# Altium PCB Micro.PcbDoc
Units mm, origin at the board's own origin, x right, y up, seen from the top; angles counter-clockwise.
Board outline 152.4 x 101.6 mm, 2 copper layers (Top Layer, Bottom Layer); 42 components, 61 nets, 210 pads, 12 vias.
Unrouted connection lines stored in the file: 96.
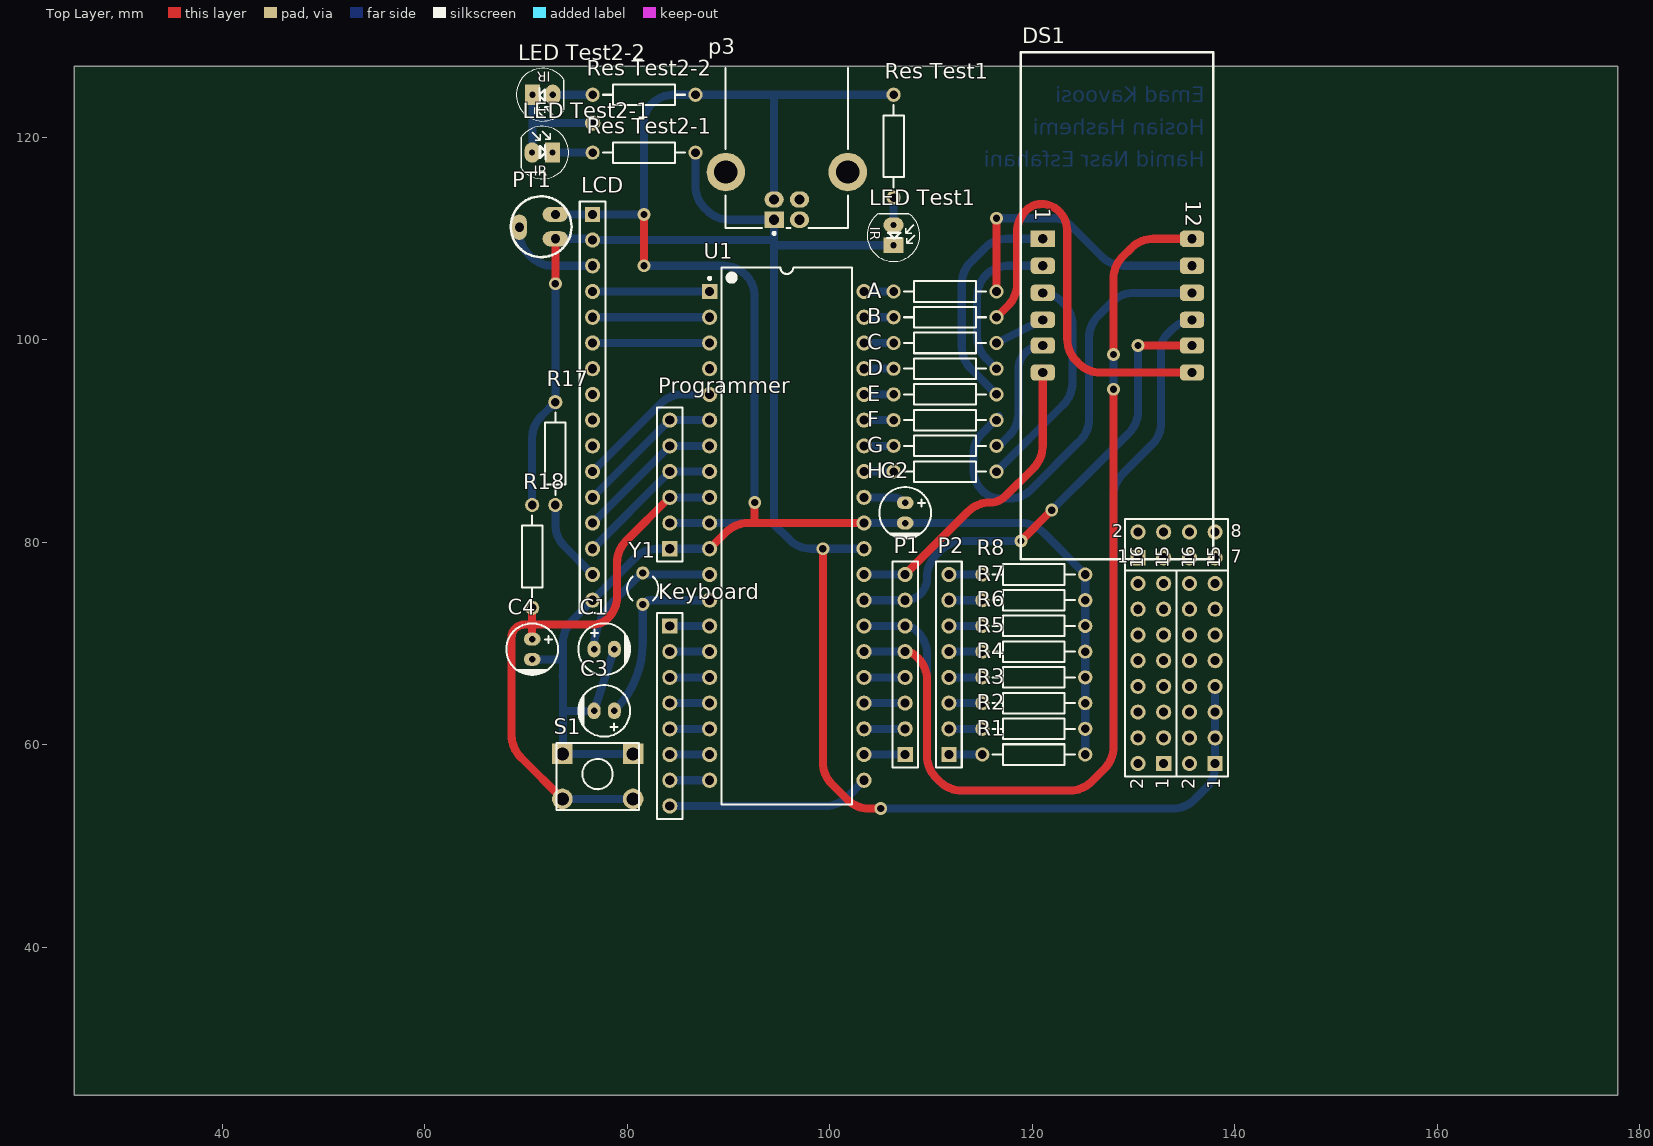
[diagram p0: Top Layer view]
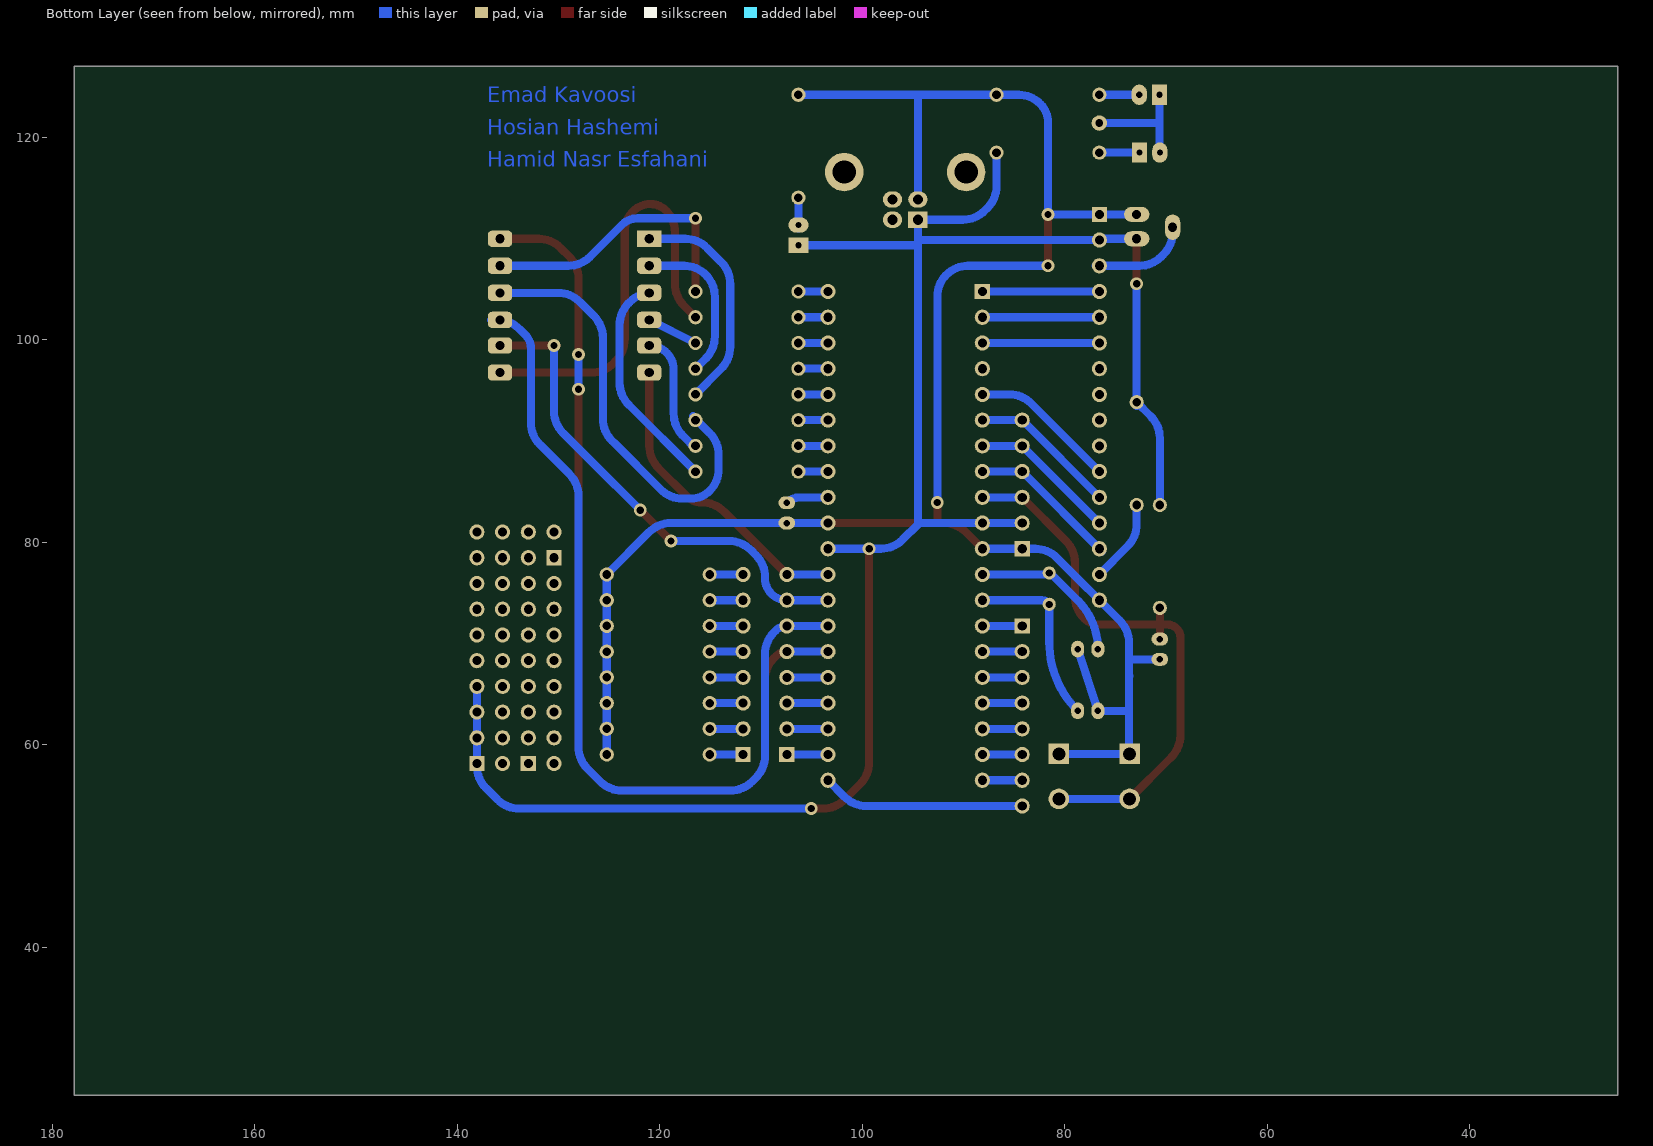
[diagram p1: Bottom Layer view, seen from below]

## Layer stack, top to bottom
Top Solder: solder mask 0.0102, Solder Resist, Dk 3.5
Top Layer: signal copper 0.0356
Dielectric 1: dielectric 0.32, FR-4, Dk 4.8
Bottom Layer: signal copper 0.0356
Bottom Solder: solder mask 0.0102, Solder Resist, Dk 3.5

## Board outline
25.4,25.4 177.8,25.4 177.8,127 25.4,127

## Design rules (kind name [scope] priority, off if disabled: settings)
Clearance [All] p1: gap=0.8 ignorepadtopadclearanceinfootprint=FALSE
PolygonConnect [All] p1: connectstyle=Relief reliefconductorwidth=0.254 reliefentries=4 polygonreliefangle="90 Angle" airgapwidth=0.254
RoomDefinition Micro [InComponentClass('Micro')] p1: confinementstyle=ConfineIn formatcopy=TRUE lockcomponents=FALSE outline 178.943,26.924 367.284,26.924 367.284,83.058 178.943,83.058
RoutingVias [All] p1: holewidth=0.711 width=1.27 viastyle="Through Hole" minholewidth=0.711 minwidth=1.27 maxholewidth=0.711 maxwidth=1.27
SolderMaskExpansion [All] p1: expansion=0.102
Width [All] p1: maxlimit=1 minlimit=0.8 preferedwidth=0.8
30 further rules are at their usual default settings.

## Components (designator, comment, footprint, x,y, rotation, side; value= is the part's Value field where it differs from the comment)
A "" AXIAL-0.4 111.379,104.775 r0 top
B "" AXIAL-0.4 111.379,102.235 r0 top
C "" AXIAL-0.4 111.379,99.695 r0 top
C1 "1uF" "cap 01" 77.724,69.469 r180 top
C2 "1uF" "cap 01" 107.442,82.915 r90 top
C3 "1uF" "cap 01" 77.724,63.373 r0 top
C4 "1uF" "cap 01" 70.612,69.453 r90 top
D "" AXIAL-0.4 111.379,97.155 r0 top
DS1 "7Segment-4Digit-CA" 7segCA 118.872,128.397 r270 top
E "" AXIAL-0.4 111.379,94.615 r0 top
F "" AXIAL-0.4 111.379,92.075 r0 top
G "" AXIAL-0.4 111.379,89.535 r0 top
H "" AXIAL-0.4 111.379,86.995 r0 top
Keyboard "" HDR1X8 84.201,71.755 r270 top
LCD "" HDR1X16 76.581,112.395 r270 top
"LED Test1" "IR Reciever" "LED-5mm-IR Reciver" 106.299,111.347 r270 top
"LED Test2-1" "IR Reciever" "LED-5mm-IR Reciver" 70.612,118.491 r0 top
"LED Test2-2" "IR Reciever" "LED-5mm-IR Reciver" 72.644,124.206 r180 top
P1 "" HDR1X8 107.442,59.055 r90 top
P2 "Header 8" HDR1X8 111.76,59.055 r90 top
p3 "USB Connector" USB2.5-2H4F 95.758,126.873 r90 top
Programmer "" HDR1X6 84.201,79.375 r90 top
PT1 "POT4" POT4 71.501,111.252 r90 top
R1 "Res2" AXIAL-0.4 120.142,59.055 r0 top value=1K
R2 "Res2" AXIAL-0.4 120.142,61.595 r0 top value=1K
R3 "Res2" AXIAL-0.4 120.142,64.135 r0 top value=1K
R4 "Res2" AXIAL-0.4 120.142,66.675 r0 top value=1K
R5 "Res2" AXIAL-0.4 120.142,69.215 r0 top value=1K
R6 "Res2" AXIAL-0.4 120.142,71.755 r0 top value=1K
R7 "Res2" AXIAL-0.4 120.142,74.295 r0 top value=1K
R8 "Res2" AXIAL-0.4 120.142,76.835 r0 top value=1K
R17 "Res2" AXIAL-0.4 72.898,88.773 r90 top value=1K
R18 "Res2" AXIAL-0.4 70.612,78.613 r90 top value=1K
"Res Test1" "" AXIAL-0.4 106.299,119.126 r270 top value=1K
"Res Test2-1" "Res2" AXIAL-0.4 81.661,118.491 r0 top value=1K
"Res Test2-2" "Res2" AXIAL-0.4 81.661,124.206 r180 top value=1K
S1 "Switch PB" "Switch - Push to On" 77.089,56.896 r0 top
U1 "ATmega32-16PU" 40P6 95.758,80.645 r0 top
Y1 "XTAL" R38 81.534,75.438 r180 top
? "" HDR2X4 130.429,78.486 r0 top
? "" HDR2X8 138.049,58.166 r90 top
? "" HDR2X8 132.969,58.166 r90 top

## Footprints (in the part's own frame and the unit in brackets; to place one, negate y for a bottom-side part, rotate by r counter-clockwise, add the part's x,y. Pads: shape width x height; smd on the part's side, far side on the other; paste and mask are expansions set on the pad)
7segCA [mm] "7seg-CA; 12 Leads"
  rect 1.6x2.4 hole 0.9: 1(18.415,2.159)
  rrect50% 1.6x2.4 hole 0.9: 2(21.082,2.159) 3(23.749,2.159) 4(26.416,2.159) 5(28.956,2.159) 6(31.623,2.159) 7(31.623,16.891) 8(28.956,16.891) 9(26.416,16.891) 10(23.749,16.891) 11(21.082,16.891) 12(18.415,16.891)
  silkscreen extent 0,0 50.04,19
40P6 [mm] "40-Pin Ceramic Dual In-Line Package (CerDIP)"
  rect 1.5x1.5 hole 0.9: 1(-7.62,24.13)
  round 1.5 hole 0.9: 2(-7.62,21.59) 3(-7.62,19.05) 4(-7.62,16.51) 5(-7.62,13.97) 6(-7.62,11.43) 7(-7.62,8.89) 8(-7.62,6.35) 9(-7.62,3.81) 10(-7.62,1.27) 11(-7.62,-1.27) 12(-7.62,-3.81) 13(-7.62,-6.35) 14(-7.62,-8.89) 15(-7.62,-11.43) 16(-7.62,-13.97) 17(-7.62,-16.51) 18(-7.62,-19.05) 19(-7.62,-21.59) 20(-7.62,-24.13) 21(7.62,-24.13) 22(7.62,-21.59) 23(7.62,-19.05) 24(7.62,-16.51) 25(7.62,-13.97) 26(7.62,-11.43) 27(7.62,-8.89) 28(7.62,-6.35) 29(7.62,-3.81) 30(7.62,-1.27) 31(7.62,1.27) 32(7.62,3.81) 33(7.62,6.35) 34(7.62,8.89) 35(7.62,11.43) 36(7.62,13.97) 37(7.62,16.51) 38(7.62,19.05) 39(7.62,21.59) 40(7.62,24.13)
  silkscreen extent -7.74,-26.5 6.45,26.5, body extent -7.05,-26.47 7.05,26.47, height 4.83
AXIAL-0.4 [mm] "Axial Device, Thru-Hole; 2 Leads; 0.4 in Pin Spacing"
  round 1.4 hole 0.85: 1(-5.08,0) 2(5.08,0)
  silkscreen extent -4.06,-1.02 4.06,1.02
"cap 01" [mm]
  oval 1.27x1.651 hole 0.635: 1(1,0) 2(-1,0)
  silkscreen extent -2.55,-2.55 2.55,2.55, body extent -2.53,-2.53 2.53,2.53, height 12.54
HDR1X6 [mm] "Connector; Header; 6 Position"
  rect 1.5x1.5 hole 0.9: 1(0,0)
  round 1.5 hole 0.9: 2(2.54,0) 3(5.08,0) 4(7.62,0) 5(10.16,0) 6(12.7,0)
  silkscreen extent -1.27,-1.27 13.97,1.27
HDR1X8 [mm] "Connector; Header; 8 Position"
  rect 1.5x1.5 hole 0.9: 1(0,0)
  round 1.5 hole 0.9: 2(2.54,0) 3(5.08,0) 4(7.62,0) 5(10.16,0) 6(12.7,0) 7(15.24,0) 8(17.78,0)
  silkscreen extent -1.27,-1.27 19.05,1.27
HDR1X16 [mm] "Connector; Header; 16 Position"
  rect 1.5x1.5 hole 0.9: 1(0,0)
  round 1.5 hole 0.9: 2(2.54,0) 3(5.08,0) 4(7.62,0) 5(10.16,0) 6(12.7,0) 7(15.24,0) 8(17.78,0) 9(20.32,0) 10(22.86,0) 11(25.4,0) 12(27.94,0) 13(30.48,0) 14(33.02,0) 15(35.56,0) 16(38.1,0)
  silkscreen extent -1.27,-1.27 39.37,1.27
HDR2X4 [mm] "Connector; Header; 4x2 Position"
  rect 1.5x1.5 hole 0.9: 1(0,0)
  round 1.5 hole 0.9: 2(0,2.54) 3(2.54,0) 4(2.54,2.54) 5(5.08,0) 6(5.08,2.54) 7(7.62,0) 8(7.62,2.54)
  silkscreen extent -1.27,-1.27 8.89,3.81
HDR2X8 [mm] "Connector; Header; 8x2 Position"
  rect 1.5x1.5 hole 0.9: 1(0,0)
  round 1.5 hole 0.9: 2(0,2.54) 3(2.54,0) 4(2.54,2.54) 5(5.08,0) 6(5.08,2.54) 7(7.62,0) 8(7.62,2.54) 9(10.16,0) 10(10.16,2.54) 11(12.7,0) 12(12.7,2.54) 13(15.24,0) 14(15.24,2.54) 15(17.78,0) 16(17.78,2.54)
  silkscreen extent -1.27,-1.27 19.05,3.81
"LED-5mm-IR Reciver" [mm]
  oval 1.5x2 hole 0.6: 1(0,0)
  rect 1.5x2 hole 0.6: 2(2,0)
  silkscreen extent -1.1,-2.6 3.6,2.6
POT4 [mm]
  oval 1.5x2.5 hole 0.9: 1(-1.27,-1.397) 2(1.143,-1.397)
  oval 2.5x1.5 hole 0.9: 3(-0.127,2.159)
  silkscreen extent -3.08,-3 2.92,3
R38 [mm] "Crystal, Thru-Hole; 2 Leads; Body 3.1 x 8.2 mm (Dia.xH)"
  round 1.3 hole 0.7: 1(0,1.55) 2(0,-1.55)
  silkscreen extent -1.55,-1.19 1.55,1.17
"Switch - Push to On" [mil]
  rect 80x80 hole 50: 1(-137.5,87.5) 1(137.5,87.5)
  round 80 hole 50: 2(-137.5,-87.5) 2(137.5,-87.5)
  silkscreen extent -160,-130 160,130, body extent -155,-121 157,123, height 205
USB2.5-2H4F [mm] "Connector; USB1.1, Type B, Thru-Hole; 4 Position; Right Angle"
  rect 1.6x1.9 hole 1: 1(-15.01,1.25)
  oval 1.6x1.9 hole 1: 2(-15.01,-1.25) 3(-13.01,-1.25) 4(-13.01,1.25)
  round 3.8 hole 2.3: 5(-10.3,6.02) 6(-10.3,-6.02)
  silkscreen extent -16.48,-6.05 -0.02,6.05, body extent -16.51,-7.45 -0.01,7.45, height 10.95

## Part data
A B C D E F G H "Res Test1": library part Res2, "Resistor", LatestRevisionDate=17-Jul-2002, LatestRevisionNote="Re-released for DXP Platform.", PackageDescription="Axial Device, Thru-Hole; 2 Leads; 0.4 in Pin Spacing", PackageReference=AXIAL-0.4, Published=8-Jun-2000, Publisher="Altium Limited"
C1 C2 C3 C4: library part Cap-Polar, "Polar Capacitor", Voltage=16V, Adding Date=1387/12/20, Designer="Saeid Jorablo", Organazation=ControTec
DS1: library part 7Seg-4Digit-CA, "7-Segment Display: CA", Colour=Read, ComponentLink1URL=http://www.picpars.com/, Designer="Seyed Mohsen Ghasemain", Published=07/31/2012, Publisher=www.picpars.com
Keyboard P1: library part "Header 8", "Header, 8-Pin", LatestRevisionDate=17-Jul-2002, LatestRevisionNote="Re-released for DXP Platform.", Publisher="Altium Limited"
LCD: library part "Header 16", "LCD", LatestRevisionDate=17-Jul-2002, LatestRevisionNote="Re-released for DXP Platform.", Publisher="Altium Limited"
"LED Test1" "LED Test2-1" "LED Test2-2": library part "LED IR Reciever", "Infra Red Reciever Photo Diode", Adding Date=1387/12/22, Designer="Saeid Jorablo", Organazation=ControTec
P2: "Header, 8-Pin", LatestRevisionDate=17-Jul-2002, LatestRevisionNote="Re-released for DXP Platform.", Publisher="Altium Limited"
p3: library part USB, "USB Connector-B Type", Adding Date=10/26/2010, Company="DASE Co", Designer="Eng. Saeid Jorablo"
Programmer: library part "Header 6", "Header, 6-Pin", LatestRevisionDate=17-Jul-2002, LatestRevisionNote="Re-released for DXP Platform.", Publisher="Altium Limited"
PT1: "Variable Potentiometer top adjust", Designer="Seyed Mohsen Ghasemian", WEB=www.picpars.com
R1 R2 R3 R4 R5 R6 R7 R8 R17 R18 "Res Test2-1" "Res Test2-2": "Resistor", LatestRevisionDate=17-Jul-2002, LatestRevisionNote="Re-released for DXP Platform.", PackageDescription="Axial Device, Thru-Hole; 2 Leads; 0.4 in Pin Spacing", PackageReference=AXIAL-0.4, Published=8-Jun-2000, Publisher="Altium Limited"
S1: "Push Button Switch"
U1: "8-bit AVR Microcontroller, 4.5-5.5V, 16MHz, 32KB Flash, 1024 Bytes EEPROM, 2KB SRAM, 40-pin PDIP, Industrial Grade (-40°C to 85°C)", Code_JEDEC=MS-011-AC, ComponentLink1Description="Manufacturer URL", ComponentLink1URL=http://www.atmel.com/, ComponentLink2Description="ATmega32(L) Datasheet", ComponentLink2URL=http://atmel.com/dyn/resources/prod_documents/doc2503.pdf, ComponentLink3Description="ATmega32(L) Summary", ComponentLink3URL=http://atmel.com/dyn/resources/prod_documents/2503S.pdf, DatasheetVersion="revQ, Feb-2011", PackageDescription="40-lead (0.600\"/15.24mm Wide) Plastic Dual Inline Package (PDIP)", PackageReference=40P6, PackageVersion="revB, Sep-2001"
Y1: "Crystal Oscillator", LatestRevisionDate=17-Jul-2002, LatestRevisionNote="Re-released for DXP Platform.", PackageDescription="Crystal, Thru-Hole; 2 Leads; Body 3.1 x 8.2 mm (Dia.xH)", PackageReference=R38, Published=8-Jun-2000, Publisher="Altium Limited"

## Free pads (board coordinates)
  round 1.524 hole 0.762: 47(76.581,121.412)

## Via types
v1: diameter 1.27, hole 0.711, Top Layer to Bottom Layer, 12 vias

## Nets (pads, with @x,y where several pads share a name; then routed paths per layer and width w, separated by ;. In a path a pad name is that pad's centre, name@x,y a point inside that pad or via, vN(x,y) a via of type N, cw(c..) or ccw(c..) an arc to the next point about the centre after c; other vN are vias at no path point)
NetA_1: A.1 U1.40
NetA_2: A.2 DS1.11
NetB_1: B.1 U1.39
NetB_2: B.2 DS1.7
NetC1_1: C1.1 U1.12 Y1.2 | length 6.9
  Bottom Layer w0.8: Y1.2@81.28,76.835 U1.12
NetC1_2: "Res Test1.1" "Res Test2-2.1" C1.2 C3.2 C4.2 p3.4 Programmer.1 S1.1 U1.11 U1.31
NetC2_1: C2.1 U1.32
NetC3_1: C3.1 U1.13 Y1.1 | length 9.2
  Bottom Layer w0.8: 82.273,74.295 U1.13 ; U1.13@88.075,74.269 ccw(c88.075,74.358) U1.13 ; U1.13@88.075,74.269 ccw(c88.075,74.358) U1.13 ; U1.13@88.075,74.269 ccw(c88.075,74.358) U1.13 ; U1.13@88.075,74.269 ccw(c88.075,74.358) U1.13 ; U1.13@88.075,74.269 ccw(c88.075,74.358) U1.13 ; U1.13@88.075,74.269 ccw(c88.075,74.358) U1.13 ; U1.13@88.075,74.269 ccw(c88.075,74.358) U1.13 ; U1.13@88.075,74.269 ccw(c88.075,74.358) U1.13 ; U1.13@88.075,74.269 ccw(c88.075,74.358) U1.13 ; U1.13@88.075,74.269 ccw(c88.075,74.358) U1.13 ; U1.13@88.075,74.269 ccw(c88.075,74.358) U1.13 ; U1.13@88.075,74.269 ccw(c88.075,74.358) U1.13 ; U1.13@88.075,74.269 ccw(c88.075,74.358) U1.13 ; U1.13@88.075,74.269 ccw(c88.075,74.358) U1.13 ; U1.13@88.075,74.269 ccw(c88.075,74.358) U1.13 ; U1.13@88.075,74.269 ccw(c88.075,74.358) U1.13 ; U1.13@88.075,74.269 ccw(c88.075,74.358) U1.13 ; U1.13@88.075,74.269 ccw(c88.075,74.358) U1.13 ; U1.13@88.075,74.269 ccw(c88.075,74.358) U1.13 ; U1.13@88.075,74.269 ccw(c88.075,74.358) U1.13 ; U1.13@88.075,74.269 ccw(c88.075,74.358) U1.13 ; U1.13@88.075,74.269 ccw(c88.075,74.358) U1.13 ; U1.13@88.075,74.269 ccw(c88.075,74.358) U1.13 ; U1.13@88.075,74.269 ccw(c88.075,74.358) U1.13 ; U1.13@88.075,74.269 ccw(c88.075,74.358) U1.13 ; U1.13@88.075,74.269 ccw(c88.075,74.358) U1.13 ; U1.13@88.075,74.269 ccw(c88.075,74.358) U1.13 ; U1.13@88.075,74.269 ccw(c88.075,74.358) U1.13 ; U1.13@88.075,74.269 ccw(c88.075,74.358) U1.13 ; U1.13@88.075,74.269 ccw(c88.075,74.358) U1.13 ; U1.13@88.075,74.269 ccw(c88.075,74.358) U1.13 ; U1.13@88.075,74.269 ccw(c88.075,74.358) U1.13 ; U1.13@88.075,74.269 ccw(c88.075,74.358) U1.13 ; U1.13@88.075,74.269 ccw(c88.075,74.358) U1.13 ; U1.13@88.075,74.269 ccw(c88.075,74.358) U1.13 ; U1.13@88.075,74.269 ccw(c88.075,74.358) U1.13 ; U1.13@88.075,74.269 ccw(c88.075,74.358) U1.13 ; U1.13@88.075,74.269 ccw(c88.075,74.358) U1.13 ; U1.13@88.075,74.269 ccw(c88.075,74.358) U1.13 ; U1.13@88.075,74.269 ccw(c88.075,74.358) U1.13 ; U1.13@88.075,74.269 ccw(c88.075,74.358) U1.13 ; U1.13@88.075,74.269 ccw(c88.075,74.358) U1.13 ; U1.13@88.075,74.269 ccw(c88.075,74.358) U1.13 ; U1.13@88.075,74.269 ccw(c88.075,74.358) U1.13 ; U1.13@88.075,74.269 ccw(c88.075,74.358) U1.13 ; U1.13@88.075,74.269 ccw(c88.075,74.358) U1.13 ; U1.13@88.075,74.269 ccw(c88.075,74.358) U1.13 ; U1.13@88.075,74.269 ccw(c88.075,74.358) U1.13
NetC4_1: C4.1 Programmer.3 R18.1 S1.2 U1.9
NetC_1: C.1 U1.38
NetC_2: C.2 DS1.4
NetD_1: D.1 U1.37
NetD_2: D.2 DS1.2
NetDS1_1: DS1.1 E.2
NetDS1_3: DS1.3 H.2
NetDS1_5: DS1.5 G.2
NetDS1_6: DS1.6 P1.5 U1.26
NetDS1_8: DS1.8 P1.6 U1.27
NetDS1_9: DS1.9 P1.7 U1.28
NetDS1_10: DS1.10 F.2
NetDS1_12: DS1.12 P1.8 U1.29
NetE_1: E.1 U1.36
NetF_1: F.1 U1.35
NetG_1: G.1 U1.34
NetH_1: H.1 U1.33
NetKeyboard_1: Keyboard.1 U1.14
NetKeyboard_2: Keyboard.2 U1.15
NetKeyboard_3: Keyboard.3 U1.16
NetKeyboard_4: Keyboard.4 U1.17
NetKeyboard_5: Keyboard.5 U1.18
NetKeyboard_6: Keyboard.6 U1.19
NetKeyboard_7: Keyboard.7 U1.20
NetKeyboard_8: Keyboard.8 U1.21
NetLCD_1: LCD.1 LCD.16 PT1.2
NetLCD_2: "LED Test1.2" "Res Test2-1.2" LCD.2 p3.1 Programmer.2 PT1.1 R17.2 R18.2 U1.10 U1.30
NetLCD_3: LCD.3 PT1.3
NetLCD_4: LCD.4 U1.1
NetLCD_5: LCD.5 U1.2
NetLCD_6: LCD.6 U1.3
NetLCD_11: LCD.11 U1.5
NetLCD_12: LCD.12 Programmer.6 U1.6
NetLCD_13: LCD.13 Programmer.5 U1.7
NetLCD_14: LCD.14 Programmer.4 U1.8
NetLCD_15: LCD.15 R17.1
"NetLED Test1_1": "LED Test1.1" "Res Test1.2"
"NetLED Test2-1_1": "LED Test2-1.1" "LED Test2-2.2"
"NetLED Test2-1_2": "LED Test2-1.2" "Res Test2-1.1"
"NetLED Test2-2_1": "LED Test2-2.1" "Res Test2-2.2"
NetP1_1: P1.1 U1.22
NetP1_2: P1.2 U1.23
NetP1_3: P1.3 U1.24
NetP1_4: P1.4 U1.25
NetP2_1: P2.1 R1.1
NetP2_2: P2.2 R2.1
NetP2_3: P2.3 R3.1
NetP2_4: P2.4 R4.1
NetP2_5: P2.5 R5.1
NetP2_6: P2.6 R6.1
NetP2_7: P2.7 R7.1
NetP2_8: P2.8 R8.1
NetR1_2: R1.2 R2.2 R3.2 R4.2 R5.2 R6.2 R7.2 R8.2
pads on no net: ?.1 ?.2 ?.3 ?.4 ?.5 ?.6 ?.7 ?.8 ?.9 ?.10 ?.11 ?.12 ?.13 ?.14 ?.15 ?.16 C2.2 LCD.7 LCD.8 LCD.9 LCD.10 p3.2 p3.3 p3.5 p3.6 U1.4
copper on no net: | length 1188.1
  Top Layer w0.8: 70.612,70.453 70.612,71.882 ; 70.612,73.533 70.612,71.882 ; v1(72.898,105.537) 72.898,109.982 ; 73.596,54.673 69.478,58.792 cw(c71.646,60.96) 68.58,60.96 68.58,70.612 cw(c69.85,70.612) 69.85,71.882 70.612,71.882 ; 78.994,74.295 78.994,77.978 cw(c82.06,77.978) 79.892,80.146 84.201,84.455 ; 78.994,74.676 cw(c75.928,74.676) 78.096,72.508 cw(c76.585,74.019) 76.585,71.882 70.612,71.882 ; v1(81.661,107.315) v1(81.661,112.395) ; 88.138,79.375 89.78,81.017 cw(c91.948,78.849) 91.948,81.915 103.378,81.915 ; 92.583,81.915 v1(92.583,83.947) ; v1(99.314,79.375) 99.314,58.293 ccw(c102.38,58.293) 100.212,56.125 101.718,54.619 ccw(c103.886,56.787) 103.886,53.721 v1(105.029,53.721) ; 107.442,69.215 cw(c107.442,67.682) 108.526,68.766 108.703,68.589 cw(c106.535,66.421) 109.601,66.421 109.601,59.309 109.601,58.928 ccw(c112.667,58.928) 110.499,56.76 110.862,56.397 ccw(c113.03,58.565) 113.03,55.499 123.698,55.499 ccw(c123.698,58.565) 125.866,56.397 127.118,57.649 ccw(c124.95,59.817) 128.016,59.817 v1(128.016,95.123) ; 107.442,76.835 113.656,83.049 cw(c115.824,80.881) 115.824,83.947 ccw(c115.824,86.093) 117.342,84.576 120.133,87.367 ccw(c117.965,89.535) 121.031,89.535 121.031,97.155 ; 116.459,102.235 117.593,103.369 ccw(c115.425,105.537) 118.491,105.537 118.491,110.617 cw(c121.557,110.617) 119.389,112.785 cw(c120.9,111.274) 120.9,113.411 cw(c120.9,110.949) 122.641,112.69 cw(c120.703,110.751) 123.444,110.751 123.444,100.076 ccw(c126.51,100.076) 124.342,97.908 124.578,97.672 ccw(c126.746,99.84) 126.746,96.774 136.398,96.774 ; 116.459,104.775 v1(116.459,112.014) ; v1(118.872,80.137) v1(121.92,83.185) ; v1(128.016,98.552) 128.016,106.045 cw(c131.082,106.045) 128.914,108.213 129.785,109.084 cw(c131.953,106.916) 131.953,109.982 136.525,109.982 ; v1@130.175,99.441 135.763,99.441
  Bottom Layer w0.8: 69.342,111.125 69.342,110.617 ccw(c72.408,110.617) 70.24,108.449 70.476,108.213 ccw(c72.644,110.381) 72.644,107.315 76.962,107.315 ; 70.612,68.453 73.66,68.453 ; 70.612,83.693 70.612,90.297 cw(c73.678,90.297) 71.51,92.465 72.898,93.853 ; 70.612,118.491 ccw(c70.535,118.568) 70.644,118.568 70.644,124.206 ; 70.644,121.412 76.581,121.412 ; 72.612,118.491 76.581,118.491 ; 72.644,124.206 76.581,124.206 ; 72.898,83.693 72.898,81.788 ccw(c75.964,81.788) 73.796,79.62 76.581,76.835 ; 72.898,93.472 v1(72.898,105.537) ; 72.898,109.982 76.655,109.982 cw(c76.655,109.548) 76.962,109.855 ; 72.898,112.395 76.962,112.395 ; 73.596,54.673 80.581,54.673 ; 73.621,66.818 cw(c73.621,66.763) 73.66,66.802 ; 74.059,63.373 76.724,63.373 78.724,69.469 ; 74.549,72.263 80.763,78.477 cw(c82.931,76.309) 82.931,79.375 84.201,79.375 88.138,79.375 ; 74.558,72.272 ccw(c76.726,70.104) 73.66,70.104 73.66,63.119 73.66,59.272 cw(c73.443,59.272) 73.597,59.118 80.581,59.118 ; 76.327,79.121 84.201,86.995 88.138,86.995 ; 76.391,81.724 84.201,89.535 88.138,89.535 ; 76.391,84.264 84.201,92.075 88.138,92.075 ; 76.391,86.804 83.303,93.717 cw(c85.471,91.549) 85.471,94.615 88.138,94.615 ; 76.581,99.695 88.138,99.695 ; 76.581,102.235 88.138,102.235 ; 76.581,104.775 88.138,104.775 ; 76.581,109.855 94.508,109.855 ; 76.581,112.395 v1(81.661,112.395) 81.661,121.49 cw(c84.232,121.49) 82.414,123.308 cw(c84.582,121.14) 84.582,124.206 86.741,124.206 94.508,124.206 ; 76.724,69.469 cw(c83.508,69.469) 78.711,74.266 81.534,77.089 ; 78.724,63.373 ccw(c71.94,70.157) 81.534,70.157 81.534,73.989 ; 81.407,73.787 81.662,74.042 cw(c82.273,73.431) 82.273,74.295 ; v1(81.661,107.315) 89.535,107.315 cw(c89.535,104.249) 91.703,106.417 cw(c89.579,104.293) 92.583,104.293 v1(92.583,83.947) ; 84.201,53.975 99.568,53.975 ccw(c99.568,57.041) 101.736,54.873 103.378,56.515 ; 84.201,56.515 88.138,56.515 ; 84.201,59.055 88.138,59.055 ; 84.201,61.595 88.138,61.595 ; 84.201,64.135 88.138,64.135 ; 84.201,66.675 88.138,66.675 ; 84.201,69.215 88.138,69.215 ; 84.201,71.755 88.138,71.755 ; 84.201,81.915 88.138,81.915 94.181,81.915 cw(c94.181,81.481) 94.488,81.788 ; 84.201,84.455 88.138,84.455 ; 86.741,118.491 86.741,115.189 ccw(c89.807,115.189) 87.639,113.021 87.899,112.761 ccw(c90.067,114.929) 90.067,111.863 94.508,111.863 94.508,81.836 cw(c94.44,81.836) 94.488,81.788 ; 94.508,109.347 106.807,109.347 ; 94.508,113.863 94.508,124.206 ; 103.378,59.055 107.442,59.055 ; 103.378,61.595 107.442,61.595 ; 103.378,64.135 107.442,64.135 ; 103.378,66.675 107.442,66.675 ; 103.378,69.215 107.442,69.215 ; 103.378,71.755 107.442,71.755 cw(c107.442,70.222) 108.526,71.306 108.703,71.129 cw(c106.535,68.961) 109.601,68.961 109.601,59.182 109.601,58.928 ccw(c112.667,58.928) 110.499,56.76 110.862,56.397 ccw(c113.03,58.565) 113.03,55.499 123.698,55.499 ccw(c123.698,58.565) 125.866,56.397 127.118,57.649 ccw(c124.95,59.817) 128.016,59.817 128.016,84.709 ; 103.378,74.295 107.442,74.295 ccw(c107.442,76.441) 108.96,74.924 ccw(c107.411,76.472) 109.601,76.472 ; 103.378,76.835 107.442,76.835 ; 103.378,79.375 98.171,79.375 cw(c98.171,82.441) 96.003,80.273 94.488,81.788 ; 103.378,81.915 107.442,81.915 118.872,81.915 cw(c118.872,78.849) 121.04,81.017 125.222,76.835 125.222,59.055 ; 103.378,84.455 106.138,84.455 cw(c106.138,82.611) 107.442,83.915 ; 103.378,86.995 106.299,86.995 ; 103.378,89.535 106.299,89.535 ; 103.378,92.075 106.299,92.075 ; 103.378,94.615 106.299,94.615 ; 103.378,97.155 106.299,97.155 ; 103.378,99.695 106.299,99.695 ; 103.378,102.235 106.299,102.235 ; 103.378,104.775 106.299,104.775 ; v1(105.029,53.721) 133.223,53.721 133.858,53.721 ccw(c133.858,56.787) 136.026,54.619 137.151,55.744 ccw(c134.983,57.912) 138.049,57.912 138.049,65.786 ; 106.299,110.998 106.299,114.046 ; 106.553,124.206 94.508,124.206 ; 109.592,76.572 cw(c112.658,76.572) 110.49,78.74 110.989,79.239 cw(c113.157,77.071) 113.157,80.137 v1(118.872,80.137) ; 111.76,59.055 115.062,59.055 ; 111.76,61.595 115.062,61.595 ; 111.76,64.135 115.062,64.135 ; 111.76,66.675 115.062,66.675 ; 111.76,69.215 115.062,69.215 ; 111.76,71.755 115.062,71.755 ; 111.76,74.295 115.062,74.295 ; 111.76,76.835 115.062,76.835 ; 116.459,86.995 123.054,93.59 ccw(c120.886,95.758) 123.952,95.758 123.952,101.473 ccw(c120.886,101.473) 123.054,103.641 122.945,103.75 ccw(c120.777,101.582) 120.777,104.648 ; 116.459,89.281 117.72,90.542 ccw(c115.552,92.71) 118.618,92.71 118.618,97.084 cw(c120.935,97.084) 119.297,98.723 cw(c121.031,96.988) 121.031,99.441 ; 116.459,94.615 113.928,97.146 cw(c116.096,99.314) 113.03,99.314 113.03,105.537 cw(c116.096,105.537) 113.928,107.705 115.307,109.084 cw(c117.475,106.916) 117.475,109.982 121.486,109.982 cw(c121.486,109.548) 121.793,109.855 ; 116.459,97.155 115.452,98.162 cw(c117.62,100.33) 114.554,100.33 114.554,104.013 114.554,104.267 cw(c117.62,104.267) 115.452,106.435 cw(c117.576,104.311) 117.576,107.315 121.539,107.315 ; 116.459,99.695 121.031,101.981 ; v1(116.459,112.014) 122.165,112.014 cw(c122.165,109.846) 123.698,111.379 126.864,108.213 ccw(c129.032,110.381) 129.032,107.315 136.398,107.315 ; 116.713,92.456 115.071,90.814 ccw(c117.239,88.646) 114.173,88.646 114.173,87.249 ccw(c117.239,87.249) 115.071,85.081 ccw(c116.889,86.899) 116.889,84.328 117.729,84.328 ccw(c117.729,87.394) 119.897,85.226 124.523,89.852 ; v1(121.92,83.185) 126.737,88.002 128.896,90.161 129.531,90.796 ccw(c127.363,92.964) 130.429,92.964 v1@130.429,99.568 ; 124.705,90.034 ccw(c122.537,92.202) 125.603,92.202 125.603,100.203 cw(c128.669,100.203) 126.501,102.371 127.88,103.75 cw(c130.048,101.582) 130.048,104.648 135.763,104.648 ; 128.016,83.439 128.016,84.582 cw(c131.082,84.582) 128.914,86.75 131.817,89.653 ccw(c129.649,91.821) 132.715,91.821 132.715,99.187 cw(c134.555,99.187) 133.254,100.488 133.849,101.083 cw(c136.017,98.915) 136.017,101.981 136.652,101.981 ; v1(128.016,95.123) v1(128.016,98.552) ; 135.456,96.901 cw(c135.456,96.467) 135.763,96.774
  other v1: 130.429,99.441

## Other copper
Bottom Layer:
  text "Emad Kavoosi" at 137.033,123.444 h1.52
  text "Hosian Hashemi" at 137.033,120.269 h1.52
  text "Hamid Nasr Esfahani" at 137.033,117.094 h1.52

## Silkscreen, mask and mechanical layers (free items; w line width, h text height)
Drill Drawing:
  lines w0.8: 67.183,52.07 67.183,127.508 139.954,127.508 139.954,52.07 67.183,52.07

## Text inside footprints (layer, text, board x,y; h text height)
DS1: Top Overlay "12" at 135.128,113.792 h1.52 r270; Top Overlay "1" at 120.269,113.03 h1.52 r270
"LED Test1": Top Overlay "IR" at 104.013,111.169 h1 r270
"LED Test2-1": Top Overlay "IR" at 70.79,116.205 h1
"LED Test2-2": Top Overlay "IR" at 72.466,126.492 h1 r180
p3: Mechanical 1 "PCB Edge" at 101.409,126.548 h0.25 r180
?: Top Overlay "2" at 127.889,80.518 h1.27; Top Overlay "1" at 128.397,77.978 h1.27; Top Overlay "7" at 139.573,77.978 h1.27; Top Overlay "8" at 139.573,80.518 h1.27
?: Top Overlay "2" at 136.017,55.626 h1.27 r90; Top Overlay "1" at 138.557,55.626 h1.27 r90; Top Overlay "15" at 138.557,77.47 h1.27 r90; Top Overlay "16" at 136.017,77.47 h1.27 r90
?: Top Overlay "2" at 130.937,55.626 h1.27 r90; Top Overlay "1" at 133.477,55.626 h1.27 r90; Top Overlay "15" at 133.477,77.47 h1.27 r90; Top Overlay "16" at 130.937,77.47 h1.27 r90